# Altium PCB PCB1_VIA.PcbDoc
Units mm, origin at the board's own origin, x right, y up, seen from the top; angles counter-clockwise.
Board outline 55 x 30 mm, 2 copper layers (Top Layer, Bottom Layer); 4 components, 2 nets, 8 pads, 66 vias.
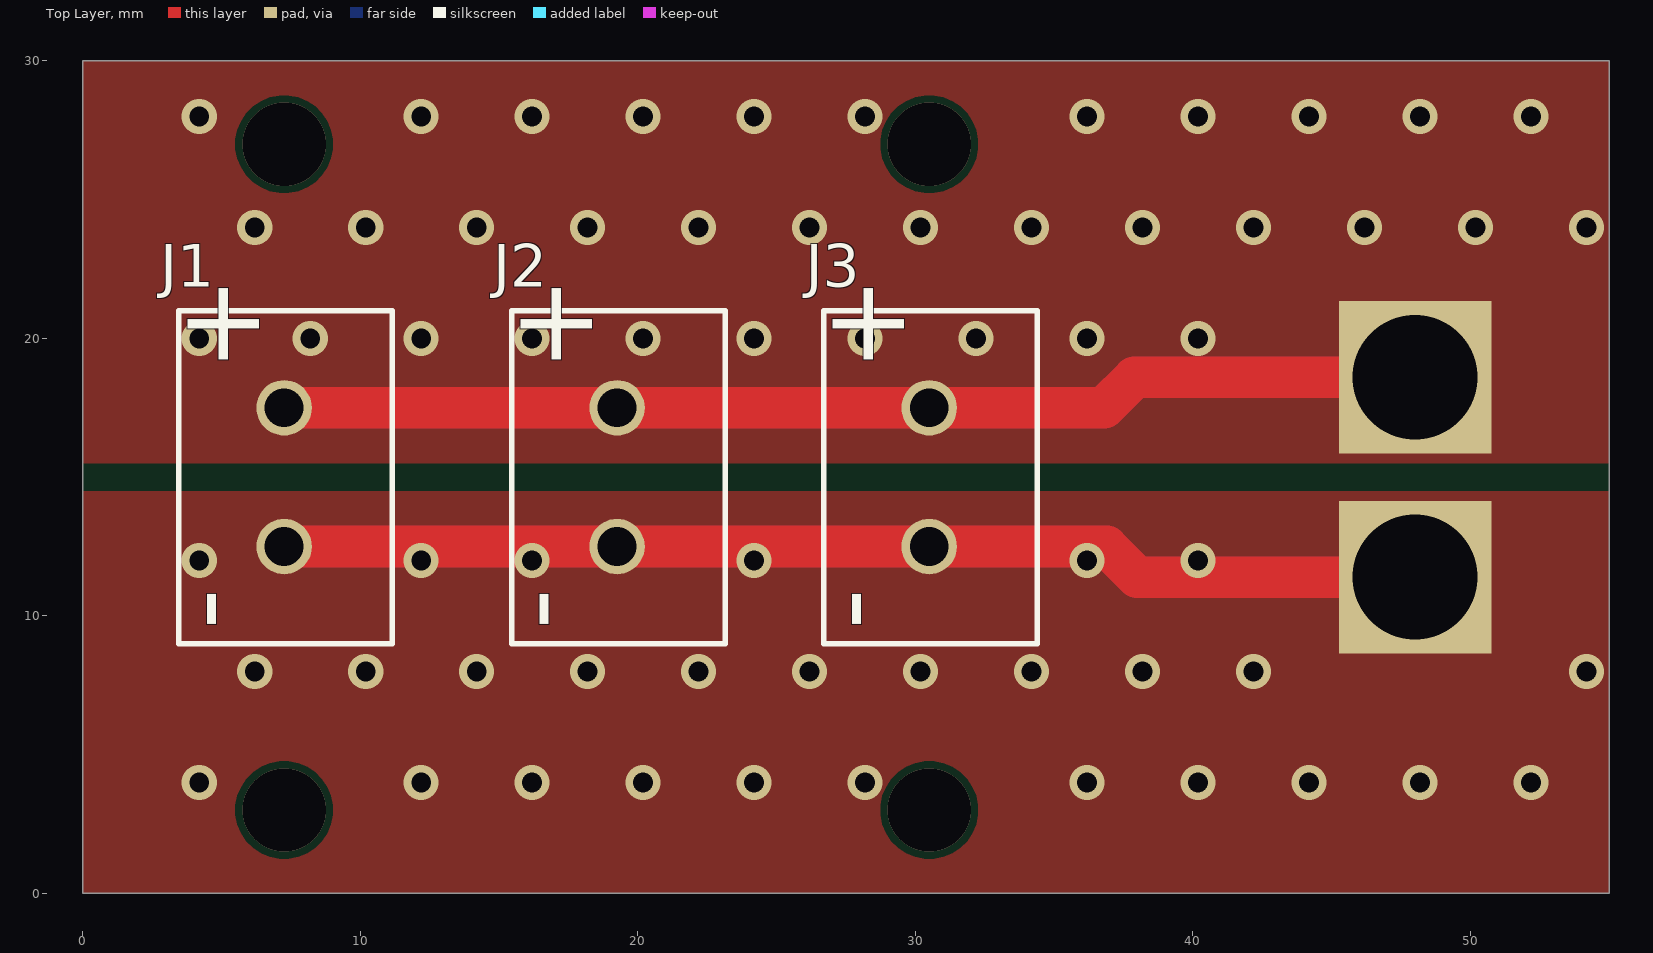
[diagram p0: Top Layer view]
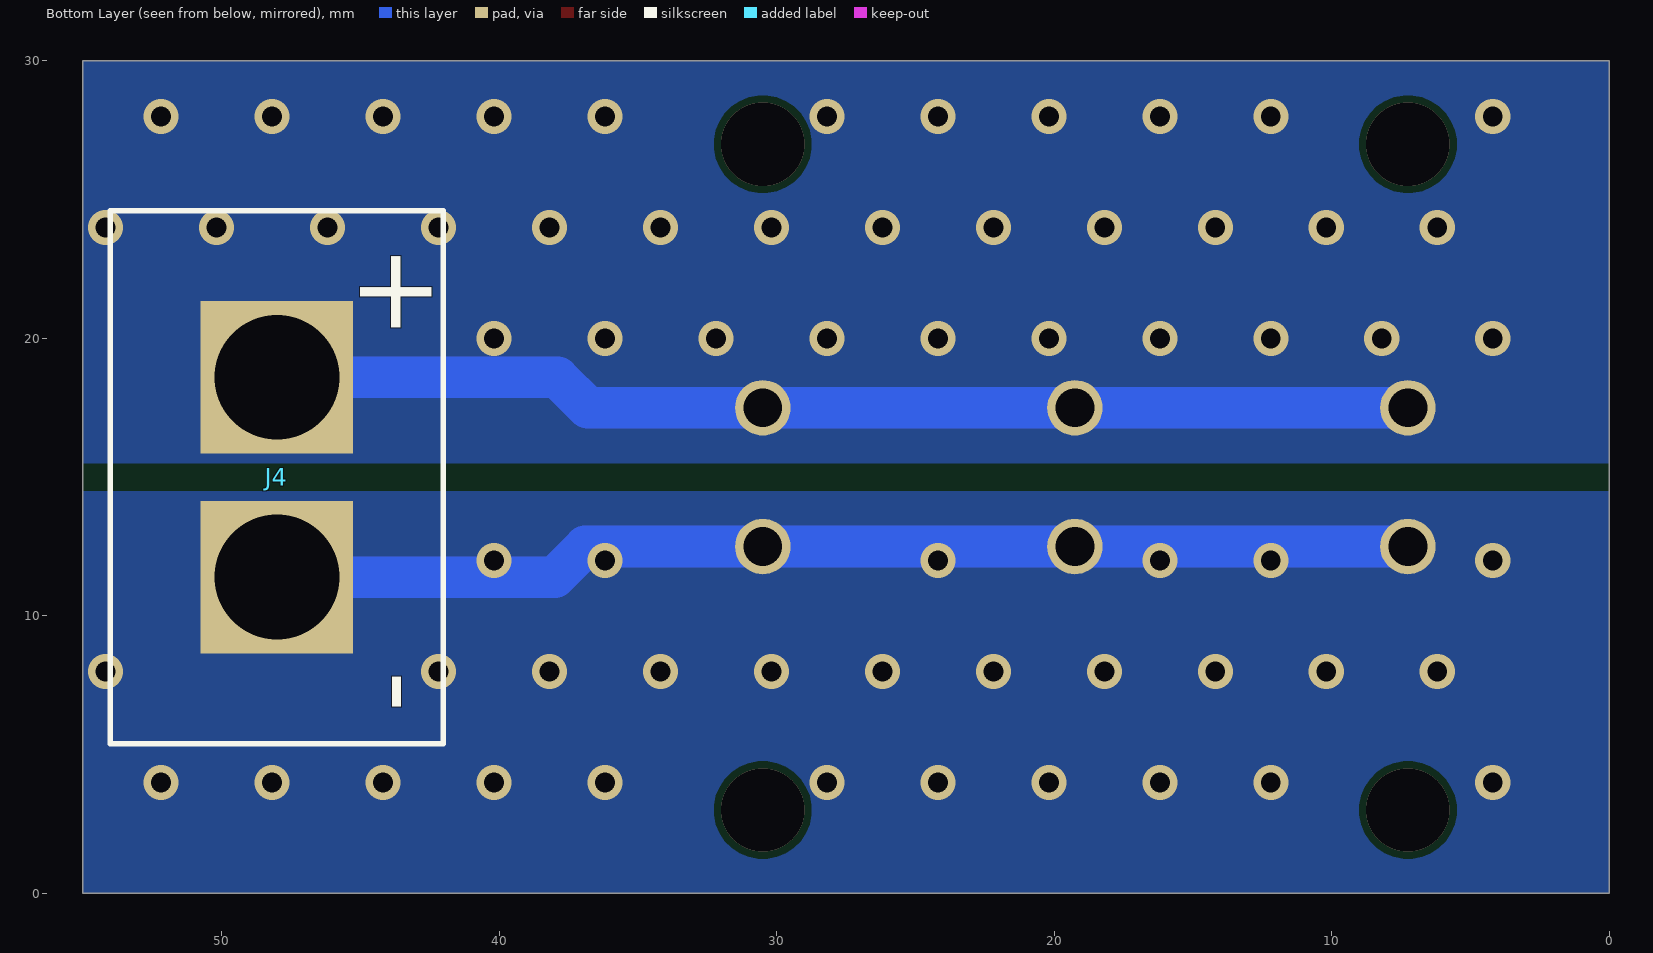
[diagram p1: Bottom Layer view, seen from below]
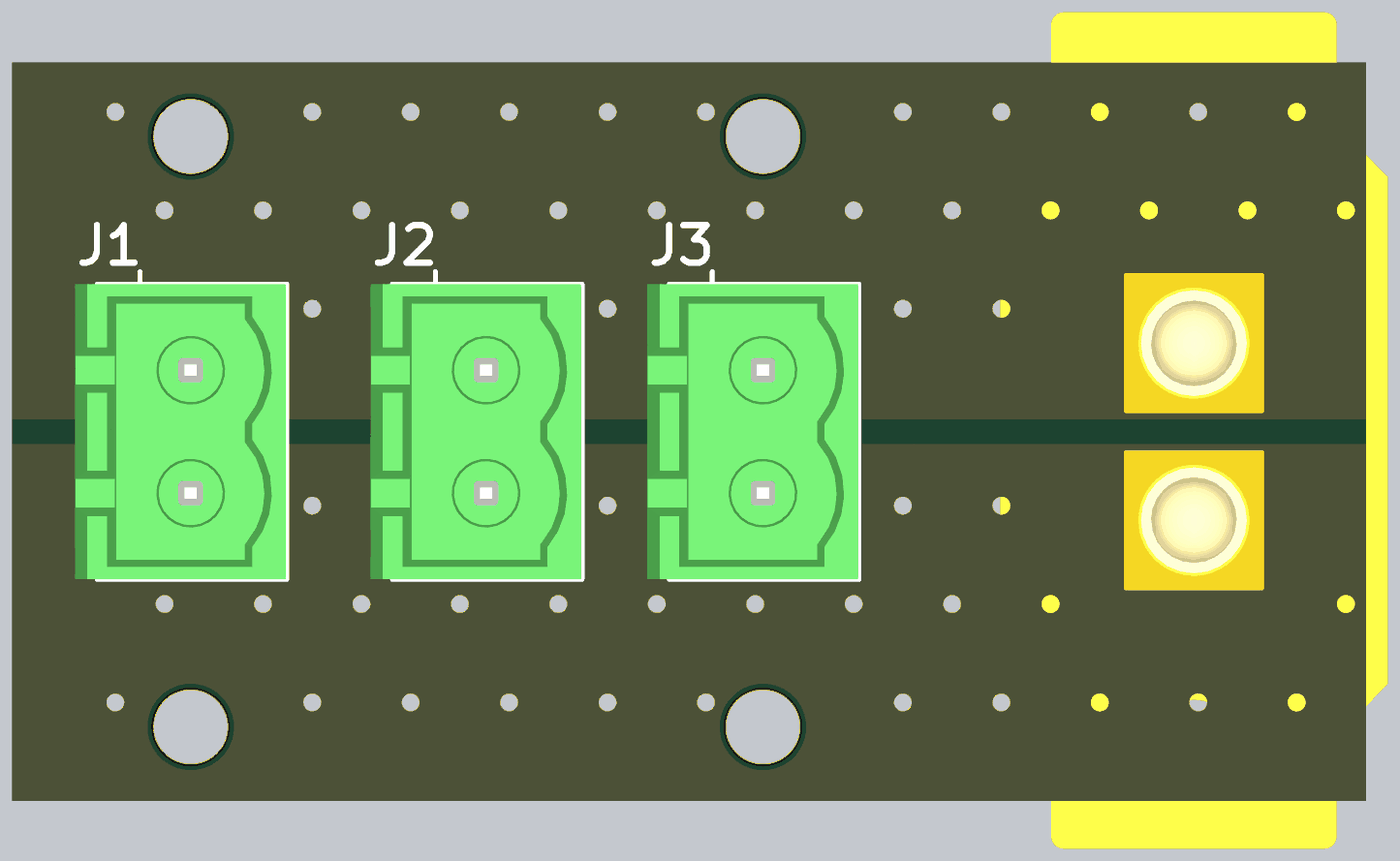
[diagram p2: 3D render of the assembled board from above, using the file's embedded part models]

## Layer stack, top to bottom
Top Solder: solder mask 0.0102, Solder Resist, Dk 3.5
Top Layer: signal copper 0.0356
Dielectric 1: dielectric 0.32, FR-4, Dk 4.8
Bottom Layer: signal copper 0.0356
Bottom Solder: solder mask 0.0102, Solder Resist, Dk 3.5

## Board outline
0,0 0,30 55,30 55,0

## Design rules (kind name [scope] priority, off if disabled: settings)
Clearance [All] p1: gap=0.254 ignorepadtopadclearanceinfootprint=FALSE except(0: Arc-Hole Track-Hole SMDPad-Hole THPad-Hole Via-Hole Fill-Hole Poly-Hole Region-Hole Text-Hole)
PolygonConnect [All] p1: connectstyle=Direct reliefconductorwidth=0.254 reliefentries=4 polygonreliefangle="90 Angle" airgapwidth=0.254
RoutingVias [All] p1: holewidth=0.711 width=1.27 viastyle="Through Hole" minholewidth=0.711 minwidth=1.27 maxholewidth=0.711 maxwidth=1.27
SolderMaskExpansion [All] p1: expansion=0.102 istentingtop=FALSE
Width [All] p1: maxlimit=1.5 minlimit=0.254 preferedwidth=1.5 minimp=50.000000 maximp=50.000000 favimp=50.000000
30 further rules are at their usual default settings.

## Components (designator, comment, footprint, x,y, rotation, side; value= is the part's Value field where it differs from the comment)
J1 "Connector_2" PCBComponent_1 7.25,17.5 r90 top
J2 "Connector_2" PCBComponent_1 19.25,17.5 r90 top
J3 "Connector_2" PCBComponent_1 30.5,17.5 r90 top
J4 "Connector_2" XT60_FEMALE_PANEL 48.012,18.6 r270 bottom

## Footprints (in the part's own frame and the unit in brackets; to place one, negate y for a bottom-side part, rotate by r counter-clockwise, add the part's x,y. Pads: shape width x height; smd on the part's side, far side on the other; paste and mask are expansions set on the pad)
PCBComponent_1 [mm]
  round 2 hole 1.4 paste-2539.97: 1(0,0) 2(-5,0)
  silkscreen extent -8.5,-3.9 3.5,3.8, body extent -8.5,-3.87 3.5,4.7, height 12.1
XT60_FEMALE_PANEL [mm]
  rect 5.5x5.5 hole 4.5 paste-2539.97: 1(0,0) 2(7.2,0)
  silkscreen extent -6,-6 13.2,6, body extent -13.45,-7.88 20.55,7.88, height 15.5

## Via types
v1: diameter 1.27, hole 0.711, Top Layer to Bottom Layer, tented both sides, 62 vias
v2: diameter 3, hole 3, Top Layer to Bottom Layer, 4 vias

## Nets (pads, with @x,y where several pads share a name; then routed paths per layer and width w, separated by ;. In a path a pad name is that pad's centre, name@x,y a point inside that pad or via, vN(x,y) a via of type N, cw(c..) or ccw(c..) an arc to the next point about the centre after c; other vN are vias at no path point)
+: J1.1 J2.1 J3.1 J4.1 | length 82.4
  Top Layer w1.5: J1.1 J2.1 J3.1 36.8,17.5 37.9,18.6 J4.1@48,18.6
  Bottom Layer w1.5: J1.1 J2.1 J3.1 36.8,17.5 37.9,18.6 J4.1@48,18.6
  other v1: 4.187,19.996 8.187,19.996 12.187,19.996 16.187,19.996 20.187,19.996 24.187,19.996 28.187,19.996 32.187,19.996 36.187,19.996 40.187,19.996 6.187,23.996 10.187,23.996 14.187,23.996 18.187,23.996 22.187,23.996 26.187,23.996 30.187,23.996 34.187,23.996 38.187,23.996 42.187,23.996 46.187,23.996 50.187,23.996 54.187,23.996 4.187,27.996 12.187,27.996 16.187,27.996 20.187,27.996 24.187,27.996 28.187,27.996 36.187,27.996 40.187,27.996 44.187,27.996 48.187,27.996 52.187,27.996
-: J1.2 J2.2 J3.2 J4.2 | length 82.4
  Top Layer w1.5: J1.2 J2.2 J3.2 36.9,12.5 38,11.4 J4.2@48,11.4
  Bottom Layer w1.5: J1.2 J2.2 J3.2 36.9,12.5 38,11.4 J4.2@48,11.4
  other v1: 4.187,3.996 12.187,3.996 16.187,3.996 20.187,3.996 24.187,3.996 28.187,3.996 36.187,3.996 40.187,3.996 44.187,3.996 48.187,3.996 52.187,3.996 6.187,7.996 10.187,7.996 14.187,7.996 18.187,7.996 22.187,7.996 26.187,7.996 30.187,7.996 34.187,7.996 38.187,7.996 42.187,7.996 54.187,7.996 4.187,11.996 12.187,11.996 16.187,11.996 24.187,11.996 36.187,11.996 40.187,11.996
copper on no net:
  other v2: 7.25,3 30.5,3 7.25,27 30.5,27

## Polygon pours and split planes (outlines as drawn)
- on Top Layer "-_L01_P001" (solid, pour order 1): 0,0 0,14.5 55,14.5 55,0
+ on Top Layer "+_L01_P000" (solid, pour order 0): 0,15.5 0,30 55,30 55,15.5
- on Bottom Layer "-_L02_P002" (solid, pour order 2): 0,0 0,14.5 55,14.5 55,0
+ on Bottom Layer "+_L02_P003" (solid, pour order 3): 0,15.5 0,30 55,30 55,15.5

## Silkscreen, mask and mechanical layers (free items; w line width, h text height)
Mechanical 1:
  the board outline again, w0.2

## Text inside footprints (layer, text, board x,y; h text height)
J1: Top Overlay "-" at 5.75,9.5 h3 r90; Top Overlay "+" at 6.35,18.8 h3 r90
J2: Top Overlay "-" at 17.75,9.5 h3 r90; Top Overlay "+" at 18.35,18.8 h3 r90
J3: Top Overlay "-" at 29,9.5 h3 r90; Top Overlay "+" at 29.6,18.8 h3 r90
J4: Bottom Overlay "+" at 45.011,23.4 h3 r90; Bottom Overlay "-" at 44.811,8 h3 r90